# Altium PCB HZSneckV1.2.PcbDoc (part 2 of 2)
Units mm, origin at the board's own origin, x right, y up, seen from the top; angles counter-clockwise.
Board outline 366.25 x 25 mm, 2 copper layers (Top Layer, Bottom Layer), stack 0.251 mm thick; 58 components, 49 nets, 275 pads, 127 vias.
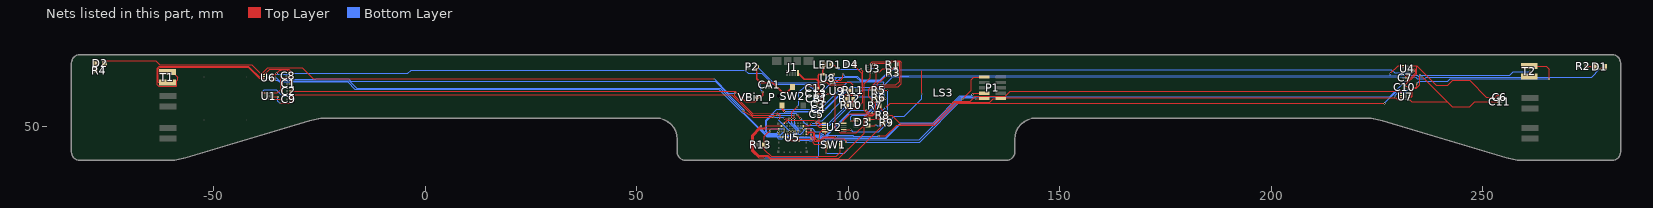
[diagram p2: the nets of this part, all layers, seen from the top]

## Via types
v1: diameter 0.45, hole 0.15, Top Layer to Bottom Layer, 113 vias
v2: diameter 0.15/0.45 (per signal layer), hole 0.15, Top Layer to Bottom Layer, 14 vias

## Nets (pads, with @x,y where several pads share a name; then routed paths per layer and width w, separated by ;. In a path a pad name is that pad's centre, name@x,y a point inside that pad or via, vN(x,y) a via of type N, cw(c..) or ccw(c..) an arc to the next point about the centre after c; other vN are vias at no path point) (continued)
HAP3_P: LS3.P1 U2.7 | length 28.6
  Top Layer w0.127: U2.7@98.821,49.173 98.834,49.185 100.536,49.185 v1(100.549,49.198) ; v1(117.352,57.61) 117.356,57.614 117.356,63.119
  Bottom Layer w0.127: v1(100.549,49.198) 101.042,48.705 107.146,48.705 110.818,52.376 113.213,52.376 117.352,56.516 v1(117.352,57.61)
N$4: U5.F7 U5.F8 | length 0.6
  Top Layer w0.1: U5.F7@87.413,47.432 U5.F8@88.063,47.432
NetC5_2: C5.2 U2.1 | length 3.4
  Top Layer w0.1: C5.2@93.056,52.762 93.056,50.899 93.282,50.673 U2.1@94.521,50.673
NetC12_1: C12.1 J1.1 LED1.2 U8.4 | length 12.1
  Top Layer w0.3: J1.1@88.103,62.531 89.573,61.061 92.446,61.061 92.817,60.69 ; C12.1@92.817,58.933 92.817,60.69 ; LED1.2@94.165,64.543 94.165,63.481 93.965,63.281 U8.4@93.965,62.238 93.154,62.238 92.817,61.901 92.817,60.69
NetD1_1: D1.1 R2.1 | length 2.3
  Top Layer w0.1: R2.1@274.346,64.101 275.438,64.101 275.505,64.034 D1.1@276.635,64.034
NetD2_1: D2.1 R4.1 | length 1.7
  Top Layer w0.1: D2.1@-77.957,64.853 -77.957,63.134 R4.1@-77.952,63.13
NetD3_1: D3.1 R5.2 | length 13.7
  Top Layer w0.1: D3.1@104.633,50.128 104.663,50.098 106.171,50.098 106.393,50.32 v1(106.479,50.32) ; R5.2@107.904,58.434 v1(109.301,58.434)
  Bottom Layer w0.1: v1(106.479,50.32) 106.529,50.32 106.769,50.08 107.673,50.08 109.301,51.707 v1(109.301,58.434)
NetD3_3: D3.3 R6.2 | length 13.5
  Top Layer w0.1: v1(100.567,51.221) 101.476,51.221 D3.3@101.833,51.578 ; R6.2@107.893,56.669 108.168,56.491 v1(108.821,56.491)
  Bottom Layer w0.1: v1(100.567,51.221) 100.567,51.705 100.498,51.774 100.498,52.163 100.891,52.556 104.23,52.556 107.96,56.286 108.587,56.286 108.792,56.491 v1(108.821,56.491)
NetD3_4: D3.4 R9.2 | length 6
  Top Layer w0.1: D3.4@104.633,51.578 109.789,51.578 109.9,51.467 R9.2@109.9,50.748
NetD4_A: D4.A R12.1 | length 11.7
  Top Layer w0.1: R12.1@99.67,56.438 99.747,56.515 99.747,56.879 100.161,57.293 102.597,57.293 103.226,57.921 103.226,62.404 101.511,64.119 D4.A@101.511,64.56
NetLED1_1: LED1.1 R10.1 | length 20.6
  Top Layer w0.1: LED1.1@96.019,64.543 96.093,64.469 96.546,64.469 v1(97.107,63.908) ; R10.1@99.834,54.881 99.748,54.795 99.748,54.098 99.807,54.039 101.858,54.039 103.429,55.61 103.429,62.979 v1(102.961,63.447)
  Bottom Layer w0.1: v1(97.107,63.908) 97.568,63.447 v1(102.961,63.447)
NetR10_2: R10.2 R12.2 U8.1 | length 16
  Top Layer w0.1: U8.1@96.197,60.338 100.482,60.338 101.016,59.805 101.016,57.566 99.421,57.566 98.837,56.982 98.837,56.201 ; 98.838,56.2 98.838,55.578 98.896,55.52 100.626,55.52 101.74,55.52 101.799,55.461 101.799,55.218 R10.2@101.462,54.881 ; 100.626,55.534 100.974,55.882 100.974,56.253 R12.2@101.159,56.438
NetR11_1: R11.1 U8.5 | length 7.2
  Top Layer w0.1: U8.5@93.965,60.338 94.92,60.338 95.476,59.782 98.987,59.782 99.045,59.723 99.045,59.699 99.833,58.911 99.833,58.888 100.289,58.432 R11.1@100.313,58.432
NetSW2_1: SW2.1 U9.3 | length 19.3
  Top Layer w0.3: SW2.1@84.334,54.884 84.334,53.999 v1(84.908,53.425) ; 97.648,58.694 97.985,59.031 98.234,59.031 v1(98.868,58.397)
  Bottom Layer w0.3: v1(84.908,53.425) 93.896,53.425 v1(98.868,58.397)
P0.19: R13.1 SW1.2 U5.C3 | length 29.7
  Top Layer w0.1: R13.1@80.113,45.619 R13.1@80.136,45.619 ; v1(81.454,48.725) 81.387,48.658 81.204,48.658 80.136,47.59 R13.1@80.136,45.619 ; SW1.2@98.153,45.598 98.116,44.798 98.068,43.779 97.12,42.831 81.719,42.831 80.136,44.414 R13.1@80.136,45.619
  Bottom Layer w0.1: v1(81.454,48.725) 81.455,48.726 81.455,49.129 81.708,49.382 v2(84.813,49.382)
P0.20: U2.5 U5.D6 | length 9.7
  Top Layer w0.1: v1(94.361,48.068) 94.361,48.114 94.603,48.356 94.603,48.583 94.521,48.665 U2.5@94.521,48.673
  Bottom Layer w0.1: v2(86.763,48.732) 87.378,48.117 88.681,48.117 89.997,49.433 91.471,49.433 92.189,48.715 93.146,48.715 93.81,48.051 94.344,48.051 v1(94.361,48.068)
P0.21: U2.4 U5.D3 | length 38
  Top Layer w0.1: v1(79.355,50.027) 79.303,50.027 77.161,47.885 77.161,44.093 78.776,42.478 80.065,42.478 v1(80.096,42.509) ; v1(92.919,46.971) 92.919,47.054 93.178,47.313 93.178,48.425 93.926,49.173 U2.4@94.521,49.173
  Bottom Layer w0.1: v1(79.355,50.027) 79.355,49.362 80.837,47.88 83.185,47.88 83.358,47.707 83.788,47.707 v2(84.813,48.732) ; v1(80.096,42.509) 92.521,42.509 92.936,42.924 92.936,46.954 v1(92.919,46.971)
P0.22: D2.2 U5.D5 | length 172
  Top Layer w0.1: D2.2@-75.857,64.853 -75.252,65.458 -63.729,65.458 -62.807,64.536 -41.107,64.536 -38.854,62.283 -38.771,62.283 -37.276,63.778 -29.173,63.778 -26.547,61.152 v1(68.276,61.152) ; v1(73.156,57.813) 73.156,57.191 77.388,52.958 77.418,52.929 77.501,52.929 83.238,52.978 cw(c83.241,52.576) 83.529,52.856 83.861,52.516 83.861,51.993 83.605,51.737 v1(83.516,51.737)
  Bottom Layer w0.1: v1(68.276,61.152) 71.615,57.813 v1(73.156,57.813) ; v1(83.516,51.737) 83.516,51.329 v2(86.113,48.732)
P0.23: D1.2 U5.F3 | length 203.7
  Top Layer w0.1: U5.F3@84.813,47.432 v1(84.913,47.332) ; v1(277.685,63.534) 277.95,63.799 278.5,63.799 D1.2@278.735,64.034
  Bottom Layer w0.1: v1(84.913,47.332) 84.913,47.237 85.067,47.083 85.067,47.027 85.138,46.956 86.136,46.956 86.56,46.532 87.127,46.532 87.881,47.286 91.646,47.286 92.105,47.746 93.274,47.746 93.527,47.493 94.695,47.493 100.018,52.816 104.207,52.816 108.636,57.245 108.636,59.826 110.465,61.655 114.224,61.655 234.077,61.554 234.497,61.133 236.195,61.133 236.615,61.554 275.705,61.554 v1(277.685,63.534)
P1.05: U1.6 U5.C10 | length 132.9
  Top Layer w0.1: U1.6@-36.026,56.843 -35.988,56.881 -34.871,56.881 v1(-34.834,56.918) ; v1(-34.35,55.403) -32.099,55.403 -31.511,55.991 -31.511,57.342 -31.452,57.401 72.465,57.401 77.317,52.549 82.816,52.549 v1(83.241,52.576) ; v1(87.191,52.585) 87.241,52.535 87.241,51.885 v1(87.291,51.835)
  Bottom Layer w0.1: v1(-34.834,56.918) -34.873,56.879 -34.873,55.926 v1(-34.35,55.403) ; v1(83.241,52.576) 83.666,52.567 87.173,52.567 v1(87.191,52.585) ; v1(87.291,51.835) 87.291,50.274 87.908,49.657 89.088,49.657 v2(89.363,49.382)
P1.06: U1.5 U5.F2 | length 130.8
  Top Layer w0.1: U1.5@-36.026,56.343 -34.182,56.343 -33.707,56.818 v1(-33.707,61.055)
  Bottom Layer w0.1: v1(-33.707,61.055) -25.949,61.055 -25.841,61.164 -18.178,61.164 -17.628,60.614 68.531,60.614 71.94,57.205 72.007,57.205 75.415,53.796 75.415,53.019 80.754,47.68 83.102,47.68 83.35,47.432 v2(84.163,47.432)
P1.07: U4.6 U5.F4 | length 158.5
  Top Layer w0.1: U5.F4@85.463,47.432 85.463,46.771 85.522,46.712 86.38,46.712 86.56,46.532 86.87,46.532 87.02,46.682 88.042,46.682 88.217,46.507 v1(88.276,46.507) ; v1(231.775,60.715) 232.181,60.715 234.131,62.665 234.131,63.274 233.876,63.529 233.424,63.529 233.397,63.508 233.216,63.37 U4.6@233.016,63.295
  Bottom Layer w0.1: v1(88.276,46.507) 88.336,46.507 88.51,46.681 90.626,46.681 90.771,46.536 91.461,46.536 92.271,47.346 93.108,47.346 93.361,47.093 108.917,47.093 112.398,50.574 120.192,50.574 126.549,56.931 227.991,56.931 v1(231.775,60.715)
P1.08: U4.5 U5.D7 | length 165.1
  Top Layer w0.1: v1(86.559,51.835) 86.559,53.25 v1(87.881,54.572) ; v1(89.883,59.508) 89.923,59.548 92.003,59.548 92.368,59.183 92.368,58.682 92.542,58.508 93.093,58.508 93.217,58.632 93.217,59.54 93.146,59.612 93.146,60.52 93.403,60.777 93.573,60.777 97.757,60.877 98.149,60.877 98.66,61.388 v1(98.66,62.328) ; U4.5@233.016,62.795 233.432,62.795 233.618,62.981 v1(233.699,62.981)
  Bottom Layer w0.1: v1(86.559,51.835) 86.559,50.639 88.091,49.107 88.271,49.107 88.438,48.94 88.438,48.577 88.218,48.357 87.788,48.357 v2(87.413,48.732) ; v1(87.881,54.572) 87.898,54.572 88.319,54.993 88.319,57.944 v1(89.883,59.508) ; v1(98.66,62.328) 99.183,61.805 102.068,61.805 102.942,60.931 107.513,60.931 109.938,63.356 228.389,63.356 229.122,62.623 233.341,62.623 v1(233.699,62.981)
P1.09: U5.D8 U6.6 | length 130.2
  Top Layer w0.1: U6.6@-36.261,61.182 U6.6@-36.261,61.182 -35.86,61.183 v1(-35.563,61.48) ; v1(75.04,53.641) 77.213,52.328 77.232,52.313 77.413,52.132 v1(82.341,52.132) ; v1(84.832,51.758) 84.851,51.777 85.875,51.777 v1(85.917,51.819)
  Bottom Layer w0.1: v1(-35.563,61.48) -35.496,61.413 -35.253,61.413 -34.51,60.67 -17.967,60.67 -16.256,58.96 69.722,58.96 v1(75.04,53.641) ; v1(82.341,52.132) 82.354,52.145 84.445,52.145 v1(84.832,51.758) ; v1(85.917,51.819) 85.917,50.878 v2(88.063,48.732)
P1.10: U5.F5 U6.5 | length 128.9
  Top Layer w0.1: U6.5@-36.261,60.682 U6.5@-36.261,60.682 -35.861,60.683 -35.651,60.893 v1(-35.558,60.893) ; U5.F5@86.113,47.432 86.113,47.334 v1(86.116,47.331)
  Bottom Layer w0.1: v1(-35.558,60.893) -35.016,60.893 -34.589,60.466 -18.394,60.466 -16.688,58.76 69.391,58.76 80.703,47.448 83.051,47.448 83.442,47.057 84.318,47.057 84.538,47.277 84.538,47.648 84.597,47.707 85.644,47.707 85.844,47.507 ; 85.845,47.507 86.021,47.331 v1(86.116,47.331)
P1.11: U5.E5 U7.6 | length 151.1
  Top Layer w0.1: v1(104.277,53.791) 105.018,53.05 v1(105.612,53.05) ; v1(108.739,54.329) 109.844,55.434 124.676,55.434 124.815,55.573 124.815,55.706 124.948,55.839 128.8,55.839 130.006,57.045 137.074,57.045 138.25,58.221 229.886,58.221 230.091,58.016 230.091,57.37 230.245,57.216 U7.6@230.645,57.216
  Bottom Layer w0.1: v2(86.113,48.082) 86.893,48.082 87.484,47.491 91.568,47.491 92.022,47.946 93.437,47.946 93.69,47.693 94.612,47.693 100.71,53.791 v1(104.277,53.791) ; v1(105.612,53.05) 105.629,53.067 105.629,53.425 105.823,53.619 108.029,53.619 v1(108.739,54.329)
P1.12: U5.E4 U7.5 | length 151.9
  Top Layer w0.1: v1(86.715,46.907) 86.74,46.882 91.126,46.882 v1(91.155,46.911) ; v1(107.146,47.668) 108.85,47.668 111.43,50.248 120.433,50.248 125.624,55.439 127.168,55.439 127.244,55.363 v1(226.738,55.363) ; U7.5@230.645,57.716 v1(230.645,58.472)
  Bottom Layer w0.1: v2(85.463,48.082) 85.552,48.082 85.927,47.707 86.332,47.707 86.715,47.324 v1(86.715,46.907) ; v1(91.155,46.911) 91.182,46.938 91.58,46.938 92.188,47.546 93.191,47.546 93.444,47.293 94.778,47.293 95.328,47.843 101.048,47.843 101.264,47.627 107.105,47.627 v1(107.146,47.668) ; v1(226.738,55.363) 229.847,58.472 v1(230.645,58.472)
P1.13: R5.1 U5.D1 | length 39.1
  Top Layer w0.1: v1(87.951,52.637) 87.951,52.577 88.633,51.895 v1(88.633,51.835) ; R5.1@106.554,58.434 107.009,58.434 107.145,58.298 v1(107.229,58.298)
  Bottom Layer w0.1: v2(83.513,48.732) 83.061,48.28 81.062,48.28 80.652,48.69 80.652,51.305 82.295,52.948 83.228,52.978 cw(c83.241,52.576) 83.241,52.978 87.611,52.977 87.64,52.948 v1(87.951,52.637) ; v1(88.633,51.835) 89.404,51.064 89.502,51.064 89.502,50.944 90.304,50.142 92.395,50.142 92.449,50.196 95.579,50.196 102.313,56.931 106.807,56.931 107.239,57.363 107.239,58.288 v1(107.229,58.298)
P1.14: R6.1 U5.E1 | length 42.8
  Top Layer w0.1: v1(106.34,57.444) 106.34,56.872 R6.1@106.543,56.669
  Bottom Layer w0.1: v2(83.513,48.082) 83.146,48.082 83.144,48.08 80.979,48.08 80.452,48.607 80.452,51.388 83.004,53.94 93.326,53.94 99.822,60.436 108.204,60.436 108.394,60.246 108.394,59.306 107.874,58.785 107.048,58.785 106.324,58.061 106.324,57.46 v1(106.34,57.444)
P1.15: R9.1 U5.B2 | length 46.9
  Top Layer w0.1: U5.B2@84.163,50.032 80.702,50.032 80.232,49.562 79.121,49.562 77.361,47.802 77.361,44.176 78.653,42.884 80.817,42.884 81.522,42.179 100.074,42.179 108.087,50.192 108.087,50.563 R9.1@108.272,50.748
PLT1_N: T1.1 U6.2 | length 40.4
  Top Layer w0.127: T1.1@-60.987,62.761 -59.712,62.761 -58.542,61.591 -58.542,60.958 -58.823,60.677 -58.823,59.518 -58.919,59.422 -59.942,59.422 -59.942,59.402 -63.096,59.402 -63.431,59.738 -63.431,63.632 -63.234,63.829 -62.863,64.2 -41.85,64.2 -41.478,63.829 -39.331,61.682 U6.2@-38.161,61.682
PLT1_P: T1.2 U6.3 | length 31.7
  Top Layer w0.127: T1.2@-60.987,60.311 -63.177,60.311 -63.177,63.527 -63.055,63.65 -63.023,63.65 -62.726,63.946 -41.986,63.946 -41.689,63.65 -41.658,63.65 -39.313,61.305 -38.409,61.305 -38.286,61.182 U6.3@-38.161,61.182
PLT2_N: T2.1 U7.2 | length 34.6
  Top Layer w0.127: U7.2@232.545,56.716 232.67,56.716 232.784,56.83 233.098,56.83 233.349,57.08 233.349,58.585 233.714,58.95 234.302,58.95 235.107,59.755 235.107,62.032 v1(235.125,62.049) ; T2.1@260.962,61.739 261.138,61.915 v1(261.138,62.869)
  Bottom Layer w0.127: v1(235.125,62.049) 235.142,62.067 256.322,62.067 257.126,62.871 261.136,62.871 v1(261.138,62.869)
PLT2_P: T2.2 U7.3 | length 43.5
  Top Layer w0.127: U7.3@232.545,57.216 232.67,57.216 232.784,57.102 232.986,57.102 233.076,57.193 233.076,58.698 233.601,59.223 234.189,59.223 234.388,59.421 v1(234.388,60.055) ; T2.2@260.962,64.189 264.954,64.189 265.659,63.484 265.659,61.114 v1(265.665,61.108)
  Bottom Layer w0.127: v1(234.388,60.055) 234.982,60.649 241.742,60.649 242.24,61.147 265.626,61.147 v1(265.665,61.108)
RESET: P1.10 U5.E11 | length 52.8
  Top Layer w0.1: U5.E11@90.013,48.082 90.38,48.082 90.781,48.483 91.491,48.483 91.834,48.14 91.834,47.45 92.09,47.193 92.09,46.454 92.149,46.396 93.522,46.396 94.382,47.256 96.369,47.256 96.642,46.983 98.944,46.983 99.411,46.516 99.411,46.256 v1(99.446,46.221) ; v1(126.95,56.356) 129.032,58.438 129.032,60.96 129.667,61.595 P1.10@132.122,61.595
  Bottom Layer w0.1: v1(99.446,46.221) 116.815,46.221 v1(126.95,56.356)
SCL: R1.1 U2.2 U3.13 U5.A3 | length 46.7
  Top Layer w0.1: U5.A3@84.813,50.682 85.552,51.421 91.839,51.421 91.998,51.262 v1(92.509,51.262) 92.509,51.172 92.729,50.952 92.729,50.916 93.472,50.173 U2.2@94.521,50.173 ; U3.13@105.725,64.511 105.725,64.906 109.702,64.906 R1.1@109.702,64.54 110.352,65.19 111.989,65.19 112.014,60.487 111.248,59.721 v1(107.793,59.721)
  Bottom Layer w0.1: v1(92.509,51.262) 93.795,51.262 98.358,55.825 98.358,57.103 100.459,59.204 105.682,59.204 106.203,59.725 107.789,59.725 v1(107.793,59.721)
SDA: R3.1 U2.3 U3.14 U5.B10 | length 48.2
  Top Layer w0.1: U5.B10@89.363,50.032 90.701,50.032 91.224,50.555 v1(91.224,50.583) ; v1(92.311,50.685) 92.311,50.59 92.47,50.431 92.47,50.272 93.069,49.673 U2.3@94.521,49.673 ; U3.14@105.225,64.511 105.225,64.729 105.686,65.19 109.982,65.19 110.182,65.39 112.192,65.39 112.516,65.065 112.516,60.049 111.794,59.327 106.186,59.327 ; v1(105.312,58.551) 106.088,59.327 106.186,59.327 ; R3.1@109.747,62.6 107.703,60.556 107.414,60.556 106.186,59.327
  Bottom Layer w0.1: v1(91.224,50.583) 91.275,50.634 92.26,50.634 v1(92.311,50.685) 92.96,50.685 93.249,50.396 95.166,50.396 103.321,58.551 v1(105.312,58.551)
SWDCLK: P1.4 U5.D11 | length 48.5
  Top Layer w0.1: U5.D11@90.013,48.732 90.062,48.683 91.748,48.683 92.034,48.397 92.034,47.533 92.29,47.276 92.29,46.857 92.551,46.596 93.354,46.596 94.226,47.468 v1(97.145,47.468) ; v1(129.338,57.489) 129.634,57.785 P1.4@132.122,57.785
  Bottom Layer w0.1: v1(97.145,47.468) 97.186,47.427 102.99,47.427 103.124,47.293 108.834,47.293 112.348,50.807 120.049,50.807 126.373,57.131 128.653,57.131 128.671,57.149 129.018,57.149 129.338,57.469 v1(129.338,57.489)
SWDIO: P1.2 U5.C11 | length 49.8
  Top Layer w0.1: U5.C11@90.013,49.382 90.825,49.382 v1(91.149,49.058) ; v1(91.171,47.908) 91.235,47.844 91.235,47.483 91.655,47.063 91.655,46.004 91.928,45.731 93.646,45.731 v1(93.673,45.704) ; v1(130.136,56.456) 132.063,56.456 P1.2@132.122,56.515
  Bottom Layer w0.1: v1(91.149,49.058) 91.16,49.047 91.16,47.919 v1(91.171,47.908) ; v1(93.673,45.704) 94.699,46.73 116.794,46.73 126.795,56.731 129.861,56.731 v1(130.136,56.456)
VBAT1: C2.2 C7.2 C9.2 C11.2 C13.2 CA1.2 P2.2 SW2.2 U1.1 U4.1 U6.1 U7.1 U8.3 U9.4 VBin_P.1 | length 359.7
  Top Layer w0.1: v1@-38.633,58.04 v1(-38.592,58.04) -38.552,58.04 -38.355,57.843 U1.1@-37.926,57.843 ; U6.1@-38.161,62.182 -36.854,63.489 -32.289,63.489 -31.445,62.646 -31.445,58.672 C2.2@-31.89,58.227 ; C9.2@-31.921,56.313 -31.899,56.335 -31.899,56.923 -32.081,57.105 v1(-32.081,57.2) -32.081,57.295 -31.899,57.477 -31.899,58.218 C2.2@-31.89,58.227 ; VBin_P.1@78.389,56.763 78.389,56.089 78.033,55.733 75.779,55.733 73.285,58.227 C2.2@-31.89,58.227 ; C13.2@92.827,57.677 92.834,57.67 v1(93.819,57.67) ; U8.3@95.583,62.11 95.593,62.115 95.817,62.238 U8.3@96.197,62.238 ; U9.4@96.91,58.691 96.91,59.324 v1(96.917,59.331) ; v1(228.094,62.441) 229.948,64.295 U4.1@231.116,64.295 ; v1(231.709,62.017) 231.776,61.95 231.776,61.783 231.792,61.767 231.792,61.607 C7.2@232.002,61.397 232.379,61.774 232.379,61.981 v1(232.446,62.048) ; U7.1@232.545,56.216 232.664,56.216 233.157,55.723 241.569,55.723 ; v1(235.661,61.631) 241.569,55.723 ; C11.2@253.546,55.723 248.083,55.723 246.939,54.579 242.713,54.579 241.569,55.723
  Top Layer w0.3: P2.2@78.278,64.022 78.278,61.211 v1(79.224,60.265) CA1.2@81.278,60.265 82.174,60.265 84.401,58.038 85.588,58.038 SW2.2@86.834,59.284 ; VBin_P.1@78.389,56.763 79.185,56.763 79.703,57.281 v1(79.703,58.076)
  Bottom Layer w0.1: v1@-38.633,58.04 -38.061,58.612 -35.257,58.612 -35.228,58.584 -33.805,57.2 v1(-32.081,57.2) ; P2.2@78.278,64.022 78.437,64.022 82.273,60.186 93.404,60.186 93.74,60.242 v1@95.595,62.098 ; v1(93.819,57.67) 93.819,58.1 97.307,61.588 ; v1(95.6,62.102) v1@95.595,62.098 ; v1(96.917,59.331) 96.917,60.157 98.348,61.588 ; v1(228.094,62.441) 228.059,62.406 228.059,61.935 ; v1(231.709,62.017) 229.817,62.017 229.735,61.935 228.059,61.935 ; v1(232.446,62.048) 234.463,62.048 234.881,61.631 v1(235.661,61.631) ; v1@95.595,62.098 96.105,61.588 97.307,61.588 ; 97.307,61.588 98.348,61.588 ; 98.348,61.588 101.913,61.588 102.82,60.681 107.558,60.681 108.812,61.935 228.059,61.935
  Bottom Layer w0.254: v1(79.224,60.265) 79.224,58.555 v1(79.703,58.076)
VDD: C1.2 C3.2 C4.2 C6.2 C8.2 C10.2 CB1.2 P1.1 R1.2 R3.2 R7.2 R8.2 SW1.1 U1.7 U1.8 U2.10 U3.5 U3.8 U3.12 U4.7 U4.8 U5.C1 U6.7 U6.8 U7.7 U7.8 U9.1 | length 440.1
  Top Layer w0.1: U6.7@-36.261,61.682 U6.8@-36.261,62.182 -35.468,62.182 v1(-35.182,62.468) -34.475,63.175 -34.029,63.175 -33.915,63.289 -32.805,63.289 -31.984,62.468 C8.2@-31.984,61.867 ; U1.7@-36.026,57.343 U1.8@-36.026,57.843 -34.976,57.843 -34.183,58.636 -34.183,61.427 -34.096,61.514 -33.634,61.514 -33.547,61.427 -32.424,61.427 C8.2@-31.984,61.867 ; C1.2@-31.859,59.953 -31.859,60.842 -31.984,60.967 C8.2@-31.984,61.867 ; U5.C1@83.513,49.382 81.08,49.382 81.06,49.362 79.204,49.362 77.578,47.736 77.578,44.267 78.761,43.084 80.9,43.084 81.605,42.379 97.717,42.379 99.854,44.475 v1(99.913,44.534) 103.734,48.354 103.734,50.251 ; C3.2@92.508,55.105 93.058,55.655 CB1.2@93.058,56.429 93.067,56.438 v1(94.198,56.438) 94.198,54.829 C4.2@93.333,53.964 ; v1(94.756,43.634) SW1.1@94.756,45.595 ; v1(94.767,57.671) 95.602,57.671 95.885,57.388 96.467,57.388 U9.1@96.91,57.831 96.91,49.517 98.044,48.383 101.866,48.383 103.734,50.251 ; U2.10@98.821,50.673 98.806,50.673 98.806,51.317 100.457,52.968 104.433,52.968 104.451,52.987 ; v1(105.225,63.403) U3.5@105.225,62.686 105.225,61.445 103.734,59.953 103.734,53.705 104.451,52.987 ; v1(106.11,63.706) 106.11,63.801 106.225,63.916 U3.12@106.225,64.511 ; R7.2@107.272,54.805 107.272,54.562 109.018,52.816 R8.2@109.018,52.613 ; R3.2@111.347,62.6 111.347,63.535 111.302,63.579 R1.2@111.302,64.54 110.348,63.586 108.102,63.586 107.365,62.848 U3.8@106.888,62.848 106.578,62.848 106.578,60.523 104.812,58.756 104.812,56.894 106.363,55.343 106.39,55.315 106.393,54.154 106.393,54.071 106.38,53.113 106.378,52.987 ; U7.7@230.645,56.716 U7.8@230.645,56.216 229.87,56.216 v1(229.281,56.805) 229.222,56.746 137.172,56.746 P1.1@136.022,56.515 134.872,56.486 134.261,56.486 133.382,55.607 127.541,55.607 127.509,55.639 125.164,55.639 120.099,50.574 112.293,50.574 110.254,52.613 R8.2@109.018,52.613 ; v1(232.502,58.866) 231.973,59.395 231.814,59.395 C10.2@231.571,59.638 234.331,62.398 234.331,63.339 234.317,63.354 234.317,64.295 ; U4.7@233.016,63.795 U4.8@233.016,64.295 234.317,64.295 ; C6.2@254.351,56.837 254.15,57.038 254.02,57.038 253.961,57.096 253.961,57.159 253.873,57.247 253.229,57.247 253.141,57.159 253.141,56.896 253.082,56.837 250.833,56.837 246.839,60.831 242.855,60.831 241.657,59.633 238.979,59.633 234.317,64.295 ; 103.734,50.251 103.734,52.118 104.051,52.435 105.81,52.435 106.171,52.796 106.187,52.797 106.212,52.821 106.299,52.909 ; 104.451,52.987 104.764,52.675 105.767,52.675 105.987,52.895 106.079,52.987 106.378,52.987 ; 106.299,52.909 106.378,52.987 ; 106.299,52.909 106.299,52.826 106.329,52.202 106.578,51.952 109.018,51.952 R8.2@109.018,52.613
  Top Layer w0.254: SW1.1@94.753,45.598 SW1.1@94.756,45.595
  Bottom Layer w0.1: v1(-35.182,62.468) -35.121,62.468 -34.948,62.295 -32.218,62.295 -32.045,62.468 -4.147,62.468 -3.393,63.222 75.524,63.222 76.278,62.468 79.545,62.468 82.065,59.948 89.847,59.948 89.885,59.91 cw(c89.883,59.508) 90.114,59.837 91.873,58.601 91.967,58.601 93.256,57.312 ; v1(94.198,56.438) 94.13,56.438 93.256,57.312 ; v1(94.756,43.634) 99.013,43.634 v1(99.913,44.534) ; v1(94.767,57.671) 94.391,57.295 93.623,57.295 93.607,57.312 93.256,57.312 ; v1(105.225,63.403) 105.283,63.403 105.586,63.706 v1(106.11,63.706) ; v1(229.281,56.805) 229.281,57.335 229.817,57.871 230.175,57.871 230.286,57.982 231.618,57.982 v1(232.502,58.866)
pads on no net: J1.2 J1.3 J1.4 J1.7 J1.8 J1.9 LS1.N2 LS1.P2 LS2.N2 LS2.P2 LS3.N2 LS3.P2 P1.6 P1.7 P1.8 SW1. SW2. SW2.3 U1.9 U1.V U2.6 U3.2 U3.3 U3.4 U3.9 U3.10 U3.11 U4.9 U4.V U5.A2 U5.A4 U5.A5 U5.A6 U5.A7 U5.A8 U5.A9 U5.A10 U5.B3 U5.B5 U5.B6 U5.B7 U5.B9 U5.C2 U5.C4 U5.C5 U5.C6 U5.C7 U5.C8 U5.C9 U5.D2 U5.D4 U5.D9 U5.D10 U5.E2 U5.E3 U5.E6 U5.E8 U5.E9 U5.E10 U5.F10 U5.H1 U5.H11 U5.K1 U5.K11 U5.L1 U5.L3 U5.L5 U5.L7 U5.L9 U5.L11 U6.9 U6.V U7.9 U7.V

## Polygon pours and split planes (outlines as drawn)
no net on Layer0 "Default Coverlay 2 Top" (split plane): -81.685,41.889 -60.92,41.889 -60.378,41.899 -59.837,41.928 -59.297,41.977 -58.76,42.046 -58.225,42.134 -57.694,42.242 -57.166,42.369 -56.644,42.514 -27.364,51.264 -26.842,51.41 -26.315,51.536 -25.784,51.644 -25.249,51.732 -24.711,51.801 -24.171,51.85 -23.63,51.879 -23.088,51.889 54.548,51.889 55.521,51.793 56.457,51.508 57.319,51.046 58.075,50.425 58.696,49.667 59.157,48.802 59.44,47.864 59.536,46.889 59.536,43.889 59.575,43.499 59.688,43.124 59.873,42.778 60.121,42.475 60.423,42.226 60.768,42.041 61.143,41.927 61.532,41.889 137.36,41.889 137.749,41.927 138.124,42.041 138.469,42.226 138.771,42.475 139.019,42.778 139.204,43.124 139.317,43.499 139.356,43.889 139.356,46.889 139.451,47.864 139.735,48.802 140.196,49.667 140.817,50.425 141.573,51.046 142.435,51.508 143.371,51.793 144.344,51.889 221.98,51.889 222.522,51.879 223.063,51.85 223.603,51.801 224.141,51.732 224.675,51.644 225.207,51.536 225.734,51.41 226.256,51.264 255.536,42.514 256.058,42.369 256.585,42.242 257.117,42.134 257.652,42.046 258.189,41.977 258.729,41.928 259.27,41.899 259.812,41.889 280.577,41.889 280.966,41.927 281.34,42.041 281.685,42.226 281.988,42.475 282.236,42.778 282.42,43.124 282.534,43.499 282.572,43.889 282.572,64.889 282.534,65.279 282.42,65.654 282.236,66 281.988,66.303 281.685,66.552 281.34,66.737 280.966,66.851 280.577,66.889 -81.685,66.889 -82.074,66.851 -82.448,66.737 -82.793,66.552 -83.096,66.303 -83.344,66 -83.528,65.654 -83.642,65.279 -83.68,64.889 -83.68,43.889 -83.642,43.499 -83.528,43.124 -83.344,42.778 -83.096,42.475 -82.793,42.226 -82.448,42.041 -82.074,41.927
no net on Layer0 "Default Coverlay 2 Bottom" (split plane): -81.685,41.889 -60.92,41.889 -60.378,41.899 -59.837,41.928 -59.297,41.977 -58.76,42.046 -58.225,42.134 -57.694,42.242 -57.166,42.369 -56.644,42.514 -27.364,51.264 -26.842,51.41 -26.315,51.536 -25.784,51.644 -25.249,51.732 -24.711,51.801 -24.171,51.85 -23.63,51.879 -23.088,51.889 54.548,51.889 55.521,51.793 56.457,51.508 57.319,51.046 58.075,50.425 58.696,49.667 59.157,48.802 59.44,47.864 59.536,46.889 59.536,43.889 59.575,43.499 59.688,43.124 59.873,42.778 60.121,42.475 60.423,42.226 60.768,42.041 61.143,41.927 61.532,41.889 137.36,41.889 137.749,41.927 138.124,42.041 138.469,42.226 138.771,42.475 139.019,42.778 139.204,43.124 139.317,43.499 139.356,43.889 139.356,46.889 139.451,47.864 139.735,48.802 140.196,49.667 140.817,50.425 141.573,51.046 142.435,51.508 143.371,51.793 144.344,51.889 221.98,51.889 222.522,51.879 223.063,51.85 223.603,51.801 224.141,51.732 224.675,51.644 225.207,51.536 225.734,51.41 226.256,51.264 255.536,42.514 256.058,42.369 256.585,42.242 257.117,42.134 257.652,42.046 258.189,41.977 258.729,41.928 259.27,41.899 259.812,41.889 280.577,41.889 280.966,41.927 281.34,42.041 281.685,42.226 281.988,42.475 282.236,42.778 282.42,43.124 282.534,43.499 282.572,43.889 282.572,64.889 282.534,65.279 282.42,65.654 282.236,66 281.988,66.303 281.685,66.552 281.34,66.737 280.966,66.851 280.577,66.889 -81.685,66.889 -82.074,66.851 -82.448,66.737 -82.793,66.552 -83.096,66.303 -83.344,66 -83.528,65.654 -83.642,65.279 -83.68,64.889 -83.68,43.889 -83.642,43.499 -83.528,43.124 -83.344,42.778 -83.096,42.475 -82.793,42.226 -82.448,42.041 -82.074,41.927

## Silkscreen, mask and mechanical layers (free items; w line width, h text height)
Mechanical 1:
  lines w0.013: -83.68,43.889 -83.642,43.499 -83.528,43.124 -83.344,42.778 -83.096,42.475 -82.793,42.226 -82.448,42.041 -82.074,41.927 -81.685,41.889 -60.92,41.889 -60.378,41.899 -59.837,41.928 -59.297,41.977 -58.76,42.046 -58.225,42.134 -57.694,42.242 -57.166,42.369 -56.644,42.514 -27.364,51.264 -26.842,51.41 -26.315,51.536 -25.784,51.644 -25.249,51.732 -24.711,51.801 -24.171,51.85 -23.63,51.879 -23.088,51.889 54.548,51.889 55.521,51.793 56.457,51.508 57.319,51.046 58.075,50.425 58.696,49.667 59.157,48.802 59.44,47.864 59.536,46.889 59.536,43.889 59.575,43.499 59.688,43.124 59.873,42.778 60.121,42.475 60.423,42.226 60.768,42.041 61.143,41.927 61.532,41.889 137.36,41.889 137.749,41.927 138.124,42.041 138.469,42.226 138.771,42.475 139.019,42.778 139.204,43.124 139.317,43.499 139.356,43.889 139.356,46.889 139.451,47.864 139.735,48.802 140.196,49.667 140.817,50.425 141.573,51.046 142.435,51.508 143.371,51.793 144.344,51.889 221.98,51.889 222.522,51.879 223.063,51.85 223.603,51.801 224.141,51.732 224.675,51.644 225.207,51.536 225.734,51.41 226.256,51.264 255.536,42.514 256.058,42.369 256.585,42.242 257.117,42.134 257.652,42.046 258.189,41.977 258.729,41.928 259.27,41.899 259.812,41.889 280.577,41.889 280.966,41.927 281.34,42.041 281.685,42.226 281.988,42.475 282.236,42.778 282.42,43.124 282.534,43.499 282.572,43.889 282.572,64.889 282.534,65.279 282.42,65.654 282.236,66 281.988,66.303 281.685,66.552 281.34,66.737 280.966,66.851 280.577,66.889 -81.685,66.889 -82.074,66.851 -82.448,66.737 -82.793,66.552 -83.096,66.303 -83.344,66 -83.528,65.654 -83.642,65.279 -83.68,64.889 -83.68,43.889
Mechanical 3:
  lines w0.013: -83.68,43.889 -83.642,43.499 -83.528,43.124 -83.344,42.778 -83.096,42.475 -82.793,42.226 -82.448,42.041 -82.074,41.927 -81.685,41.889 -60.92,41.889 -60.378,41.899 -59.837,41.928 -59.297,41.977 -58.76,42.046 -58.225,42.134 -57.694,42.242 -57.166,42.369 -56.644,42.514 -27.364,51.264 -26.842,51.41 -26.315,51.536 -25.784,51.644 -25.249,51.732 -24.711,51.801 -24.171,51.85 -23.63,51.879 -23.088,51.889 54.548,51.889 55.521,51.793 56.457,51.508 57.319,51.046 58.075,50.425 58.696,49.667 59.157,48.802 59.44,47.864 59.536,46.889 59.536,43.889 59.575,43.499 59.688,43.124 59.873,42.778 60.121,42.475 60.423,42.226 60.768,42.041 61.143,41.927 61.532,41.889 137.36,41.889 137.749,41.927 138.124,42.041 138.469,42.226 138.771,42.475 139.019,42.778 139.204,43.124 139.317,43.499 139.356,43.889 139.356,46.889 139.451,47.864 139.735,48.802 140.196,49.667 140.817,50.425 141.573,51.046 142.435,51.508 143.371,51.793 144.344,51.889 221.98,51.889 222.522,51.879 223.063,51.85 223.603,51.801 224.141,51.732 224.675,51.644 225.207,51.536 225.734,51.41 226.256,51.264 255.536,42.514 256.058,42.369 256.585,42.242 257.117,42.134 257.652,42.046 258.189,41.977 258.729,41.928 259.27,41.899 259.812,41.889 280.577,41.889 280.966,41.927 281.34,42.041 281.685,42.226 281.988,42.475 282.236,42.778 282.42,43.124 282.534,43.499 282.572,43.889 282.572,64.889 282.534,65.279 282.42,65.654 282.236,66 281.988,66.303 281.685,66.552 281.34,66.737 280.966,66.851 280.577,66.889 -81.685,66.889 -82.074,66.851 -82.448,66.737 -82.793,66.552 -83.096,66.303 -83.344,66 -83.528,65.654 -83.642,65.279 -83.68,64.889 -83.68,43.889
Board Outline:
  drawing of 226 lines, arcs and shapes, not listed

## Text inside footprints (layer, text, board x,y; h text height)
J1: Bottom Designator "PCB EDGE" at 94.931,67.004 h0.3 r180
P1: Flex Top Overlay "1" at 137.654,56.62 h1.02 r270